# Altium PCB FM375_LQFP64_SOCKET.PcbDoc (part 3 of 3)
Units mil, origin at the board's own origin, x right, y up, seen from the top; angles counter-clockwise.
Board outline 6000 x 4000 mil, 2 copper layers (Top Layer, Bottom Layer); 12 components, 66 nets, 201 pads, 0 vias.
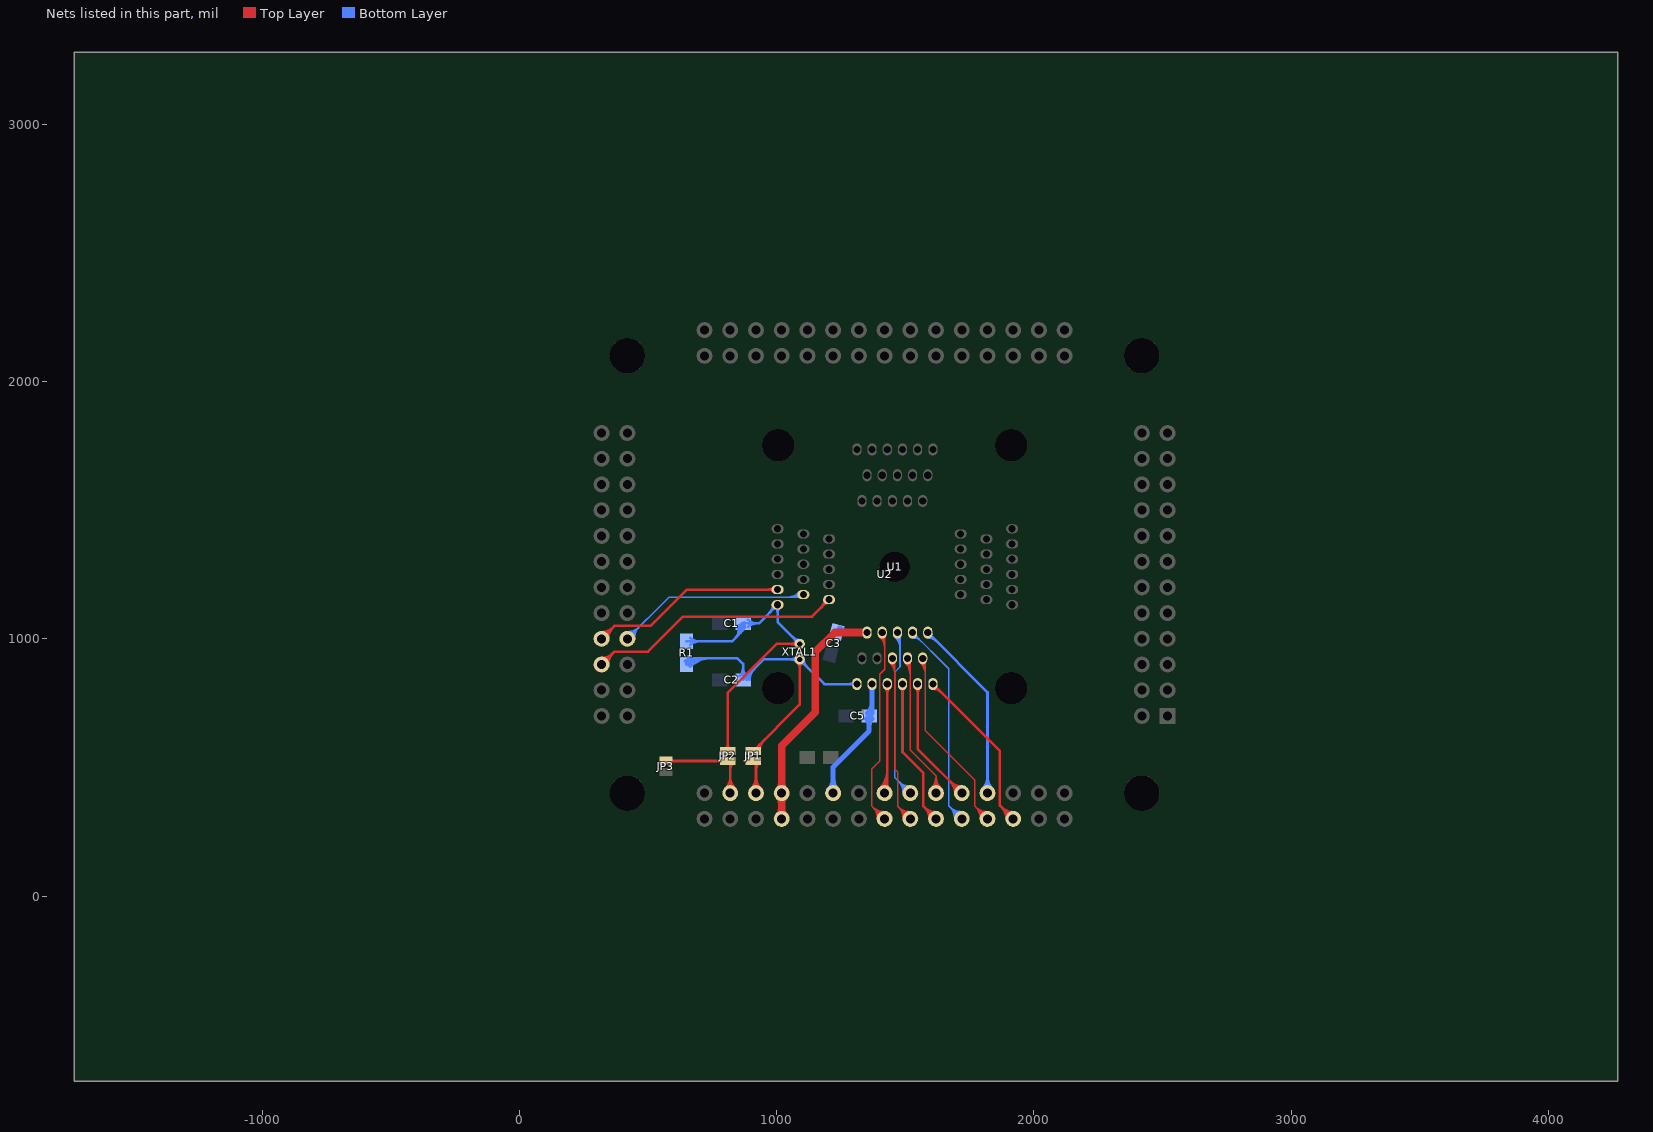
[diagram p3: the nets of this part, all layers, seen from the top]

## Nets (pads, with @x,y where several pads share a name; then routed paths per layer and width w, separated by ;. In a path a pad name is that pad's centre, name@x,y a point inside that pad or via, vN(x,y) a via of type N, cw(c..) or ccw(c..) an arc to the next point about the centre after c; other vN are vias at no path point) (continued)
PF4: U1.45 U2.71 | length 1593.4
  Top Layer w10: U2.71@320,1000 370,1050 510,1050 651.42,1191.42 U1.45@1004.09,1191.42 ; U2.71@320,1016 ccw(c320,1054.63) 347.31,1027.31 ; U2.71@320,1016 ccw(c320,1054.63) 347.31,1027.31 ; U2.71@320,1016 ccw(c320,1054.63) 347.31,1027.31 ; U2.71@320,1016 ccw(c320,1054.63) 347.31,1027.31 ; U2.71@320,1026 ccw(c320,1088.77) 364.38,1044.38 ; U2.71@320,1026 ccw(c320,1088.77) 364.38,1044.38 ; U2.71@320,1026 ccw(c320,1088.77) 364.38,1044.38 ; U2.71@320,1026 ccw(c320,1088.77) 364.38,1044.38 ; U2.71@336,1000 cw(c374.63,1000) 347.31,1027.31 ; U2.71@336,1000 cw(c374.63,1000) 347.31,1027.31 ; U2.71@336,1000 cw(c374.63,1000) 347.31,1027.31 ; U2.71@336,1000 cw(c374.63,1000) 347.31,1027.31 ; U2.71@346,1000 cw(c408.77,1000) 364.38,1044.38 ; U2.71@346,1000 cw(c408.77,1000) 364.38,1044.38 ; U2.71@346,1000 cw(c408.77,1000) 364.38,1044.38 ; U2.71@346,1000 cw(c408.77,1000) 364.38,1044.38 ; 967.49,1191.42 cw(c967.49,1160.72) U1.45@989.2,1182.43 ; 967.49,1191.42 ccw(c967.49,1222.12) U1.45@989.2,1200.41 ; 967.49,1191.42 cw(c967.49,1160.72) U1.45@989.2,1182.43 ; 967.49,1191.42 ccw(c967.49,1222.12) U1.45@989.2,1200.41 ; 967.49,1191.42 ccw(c967.49,1222.12) U1.45@989.2,1200.41 ; 967.49,1191.42 cw(c967.49,1160.72) U1.45@989.2,1182.43 ; 967.49,1191.42 ccw(c967.49,1222.12) U1.45@989.2,1200.41 ; 967.49,1191.42 cw(c967.49,1160.72) U1.45@989.2,1182.43
PF5: U1.46 U2.72 | length 2390.3
  Bottom Layer w6: U2.72@420,1000 581,1161 1093.36,1161 U1.46@1104.09,1171.73 ; U2.72@420,1016 ccw(c420,1054.63) 447.31,1027.31 ; U2.72@420,1016 ccw(c420,1054.63) 447.31,1027.31 ; U2.72@420,1016 ccw(c420,1054.63) 447.31,1027.31 ; U2.72@420,1016 ccw(c420,1054.63) 447.31,1027.31 ; U2.72@420,1022 ccw(c420,1075.11) 457.56,1037.56 ; U2.72@420,1022 ccw(c420,1075.11) 457.56,1037.56 ; U2.72@420,1022 ccw(c420,1075.11) 457.56,1037.56 ; U2.72@420,1022 ccw(c420,1075.11) 457.56,1037.56 ; U2.72@420,1028 ccw(c420,1095.6) 467.8,1047.8 ; U2.72@420,1028 ccw(c420,1095.6) 467.8,1047.8 ; U2.72@420,1028 ccw(c420,1095.6) 467.8,1047.8 ; U2.72@420,1028 ccw(c420,1095.6) 467.8,1047.8 ; U2.72@436,1000 cw(c474.63,1000) 447.31,1027.31 ; U2.72@436,1000 cw(c474.63,1000) 447.31,1027.31 ; U2.72@436,1000 cw(c474.63,1000) 447.31,1027.31 ; U2.72@436,1000 cw(c474.63,1000) 447.31,1027.31 ; U2.72@442,1000 cw(c495.11,1000) 457.56,1037.56 ; U2.72@442,1000 cw(c495.11,1000) 457.56,1037.56 ; U2.72@442,1000 cw(c495.11,1000) 457.56,1037.56 ; U2.72@442,1000 cw(c495.11,1000) 457.56,1037.56 ; U2.72@448,1000 cw(c515.6,1000) 467.8,1047.8 ; U2.72@448,1000 cw(c515.6,1000) 467.8,1047.8 ; U2.72@448,1000 cw(c515.6,1000) 467.8,1047.8 ; U2.72@448,1000 cw(c515.6,1000) 467.8,1047.8 ; 1036.75,1161 ccw(c1036.75,1233.17) U1.46@1087.78,1182.14 ; 1036.75,1161 ccw(c1036.75,1233.17) U1.46@1087.78,1182.14 ; 1036.75,1161 ccw(c1036.75,1233.17) U1.46@1087.78,1182.14 ; 1036.75,1161 ccw(c1036.75,1233.17) U1.46@1087.78,1182.14 ; 1051.24,1161 ccw(c1051.24,1218.69) U1.46@1092.03,1177.9 ; 1051.24,1161 ccw(c1051.24,1218.69) U1.46@1092.03,1177.9 ; 1051.24,1161 ccw(c1051.24,1218.69) U1.46@1092.03,1177.9 ; 1051.24,1161 ccw(c1051.24,1218.69) U1.46@1092.03,1177.9 ; 1065.72,1161 ccw(c1065.72,1204.2) U1.46@1096.27,1173.65 ; 1065.72,1161 ccw(c1065.72,1204.2) U1.46@1096.27,1173.65 ; 1065.72,1161 ccw(c1065.72,1204.2) U1.46@1096.27,1173.65 ; 1065.72,1161 ccw(c1065.72,1204.2) U1.46@1096.27,1173.65 ; 1080.21,1161 ccw(c1080.21,1189.72) U1.46@1100.51,1169.41 ; 1080.21,1161 ccw(c1080.21,1189.72) U1.46@1100.51,1169.41 ; 1080.21,1161 ccw(c1080.21,1189.72) U1.46@1100.51,1169.41 ; 1080.21,1161 ccw(c1080.21,1189.72) U1.46@1100.51,1169.41
PF6: U1.47 U2.73 | length 1818.5
  Top Layer w10: U2.73@320,900 370,950 501,950 637,1086 1138.05,1086 U1.47@1204.09,1152.05 ; U2.73@320,916 ccw(c320,954.63) 347.31,927.31 ; U2.73@320,916 ccw(c320,954.63) 347.31,927.31 ; U2.73@320,916 ccw(c320,954.63) 347.31,927.31 ; U2.73@320,916 ccw(c320,954.63) 347.31,927.31 ; U2.73@320,926 ccw(c320,988.77) 364.38,944.38 ; U2.73@320,926 ccw(c320,988.77) 364.38,944.38 ; U2.73@320,926 ccw(c320,988.77) 364.38,944.38 ; U2.73@320,926 ccw(c320,988.77) 364.38,944.38 ; U2.73@336,900 cw(c374.63,900) 347.31,927.31 ; U2.73@336,900 cw(c374.63,900) 347.31,927.31 ; U2.73@336,900 cw(c374.63,900) 347.31,927.31 ; U2.73@336,900 cw(c374.63,900) 347.31,927.31 ; U2.73@346,900 cw(c408.77,900) 364.38,944.38 ; U2.73@346,900 cw(c408.77,900) 364.38,944.38 ; U2.73@346,900 cw(c408.77,900) 364.38,944.38 ; U2.73@346,900 cw(c408.77,900) 364.38,944.38 ; 1172.3,1120.26 ccw(c1140.51,1152.05) U1.47@1185.47,1152.05 ; 1172.3,1120.26 ccw(c1140.51,1152.05) U1.47@1185.47,1152.05 ; 1172.3,1120.26 ccw(c1140.51,1152.05) U1.47@1185.47,1152.05 ; 1172.3,1120.26 ccw(c1140.51,1152.05) U1.47@1185.47,1152.05 ; 1186.56,1134.51 cw(c1198.19,1122.89) U1.47@1198.19,1139.33 ; 1186.56,1134.51 cw(c1198.19,1122.89) U1.47@1198.19,1139.33 ; 1186.56,1134.51 cw(c1198.19,1122.89) U1.47@1198.19,1139.33 ; 1186.56,1134.51 cw(c1198.19,1122.89) U1.47@1198.19,1139.33
PF7: U1.64 U2.103 | length 1483.5
  Top Layer w10: U1.64@1607.64,824.09 1868,563.73 1868,352 U2.103@1920,300 ; U1.64@1607.64,805.47 cw(c1607.64,760.51) 1639.43,792.3 ; U1.64@1607.64,805.47 cw(c1607.64,760.51) 1639.43,792.3 ; U1.64@1607.64,805.47 cw(c1607.64,760.51) 1639.43,792.3 ; U1.64@1607.64,805.47 cw(c1607.64,760.51) 1639.43,792.3 ; U1.64@1620.35,818.19 ccw(c1636.8,818.19) 1625.17,806.56 ; U1.64@1620.35,818.19 ccw(c1636.8,818.19) 1625.17,806.56 ; U1.64@1620.35,818.19 ccw(c1636.8,818.19) 1625.17,806.56 ; U1.64@1620.35,818.19 ccw(c1636.8,818.19) 1625.17,806.56 ; 1875.62,344.38 cw(c1831.23,300) U2.103@1894,300 ; 1875.62,344.38 ccw(c1920,388.77) U2.103@1920,326 ; 1875.62,344.38 cw(c1831.23,300) U2.103@1894,300 ; 1875.62,344.38 ccw(c1920,388.77) U2.103@1920,326 ; 1875.62,344.38 ccw(c1920,388.77) U2.103@1920,326 ; 1875.62,344.38 cw(c1831.23,300) U2.103@1894,300 ; 1875.62,344.38 ccw(c1920,388.77) U2.103@1920,326 ; 1875.62,344.38 cw(c1831.23,300) U2.103@1894,300 ; 1892.69,327.31 cw(c1865.37,300) U2.103@1904,300 ; 1892.69,327.31 ccw(c1920,354.63) U2.103@1920,316 ; 1892.69,327.31 cw(c1865.37,300) U2.103@1904,300 ; 1892.69,327.31 ccw(c1920,354.63) U2.103@1920,316 ; 1892.69,327.31 ccw(c1920,354.63) U2.103@1920,316 ; 1892.69,327.31 cw(c1865.37,300) U2.103@1904,300 ; 1892.69,327.31 ccw(c1920,354.63) U2.103@1920,316 ; 1892.69,327.31 cw(c1865.37,300) U2.103@1904,300
PG0: U1.56 U2.95 | length 2249.9
  Top Layer w6: U1.56@1450.16,924.09 1460,914.25 1460,493 1471,482 1471,349 U2.95@1520,300 ; U1.56@1439.75,907.78 cw(c1390.87,858.9) 1460,858.9 ; U1.56@1439.75,907.78 cw(c1390.87,858.9) 1460,858.9 ; U1.56@1439.75,907.78 cw(c1390.87,858.9) 1460,858.9 ; U1.56@1439.75,907.78 cw(c1390.87,858.9) 1460,858.9 ; U1.56@1443.99,912.03 cw(c1405.35,873.38) 1460,873.38 ; U1.56@1443.99,912.03 cw(c1405.35,873.38) 1460,873.38 ; U1.56@1443.99,912.03 cw(c1405.35,873.38) 1460,873.38 ; U1.56@1443.99,912.03 cw(c1405.35,873.38) 1460,873.38 ; U1.56@1448.24,916.27 cw(c1419.84,887.87) 1460,887.87 ; U1.56@1448.24,916.27 cw(c1419.84,887.87) 1460,887.87 ; U1.56@1448.24,916.27 cw(c1419.84,887.87) 1460,887.87 ; U1.56@1448.24,916.27 cw(c1419.84,887.87) 1460,887.87 ; U1.56@1452.48,920.51 cw(c1434.32,902.35) 1460,902.35 ; U1.56@1452.48,920.51 cw(c1434.32,902.35) 1460,902.35 ; U1.56@1452.48,920.51 cw(c1434.32,902.35) 1460,902.35 ; U1.56@1452.48,920.51 cw(c1434.32,902.35) 1460,902.35 ; 1472.2,347.8 cw(c1424.4,300) U2.95@1492,300 ; 1472.2,347.8 ccw(c1520,395.6) U2.95@1520,328 ; 1472.2,347.8 cw(c1424.4,300) U2.95@1492,300 ; 1472.2,347.8 ccw(c1520,395.6) U2.95@1520,328 ; 1472.2,347.8 ccw(c1520,395.6) U2.95@1520,328 ; 1472.2,347.8 cw(c1424.4,300) U2.95@1492,300 ; 1472.2,347.8 ccw(c1520,395.6) U2.95@1520,328 ; 1472.2,347.8 cw(c1424.4,300) U2.95@1492,300 ; 1482.44,337.56 cw(c1444.89,300) U2.95@1498,300 ; 1482.44,337.56 ccw(c1520,375.11) U2.95@1520,322 ; 1482.44,337.56 cw(c1444.89,300) U2.95@1498,300 ; 1482.44,337.56 ccw(c1520,375.11) U2.95@1520,322 ; 1482.44,337.56 ccw(c1520,375.11) U2.95@1520,322 ; 1482.44,337.56 cw(c1444.89,300) U2.95@1498,300 ; 1482.44,337.56 ccw(c1520,375.11) U2.95@1520,322 ; 1482.44,337.56 cw(c1444.89,300) U2.95@1498,300 ; 1492.69,327.31 cw(c1465.37,300) U2.95@1504,300 ; 1492.69,327.31 ccw(c1520,354.63) U2.95@1520,316 ; 1492.69,327.31 cw(c1465.37,300) U2.95@1504,300 ; 1492.69,327.31 ccw(c1520,354.63) U2.95@1520,316 ; 1492.69,327.31 ccw(c1520,354.63) U2.95@1520,316 ; 1492.69,327.31 cw(c1465.37,300) U2.95@1504,300 ; 1492.69,327.31 ccw(c1520,354.63) U2.95@1520,316 ; 1492.69,327.31 cw(c1465.37,300) U2.95@1504,300
PG1: U1.57 U2.96 | length 2271.8
  Bottom Layer w6: U1.57@1469.84,1024.09 1480,1013.94 1480,891 1460,871 1460,460 U2.96@1520,400 ; U1.57@1459.44,1007.78 cw(c1409.79,958.14) 1480,958.14 ; U1.57@1459.44,1007.78 cw(c1409.79,958.14) 1480,958.14 ; U1.57@1459.44,1007.78 cw(c1409.79,958.14) 1480,958.14 ; U1.57@1459.44,1007.78 cw(c1409.79,958.14) 1480,958.14 ; U1.57@1463.68,1012.03 cw(c1424.28,972.62) 1480,972.62 ; U1.57@1463.68,1012.03 cw(c1424.28,972.62) 1480,972.62 ; U1.57@1463.68,1012.03 cw(c1424.28,972.62) 1480,972.62 ; U1.57@1463.68,1012.03 cw(c1424.28,972.62) 1480,972.62 ; U1.57@1467.92,1016.27 cw(c1438.76,987.11) 1480,987.11 ; U1.57@1467.92,1016.27 cw(c1438.76,987.11) 1480,987.11 ; U1.57@1467.92,1016.27 cw(c1438.76,987.11) 1480,987.11 ; U1.57@1467.92,1016.27 cw(c1438.76,987.11) 1480,987.11 ; U1.57@1472.16,1020.51 cw(c1453.25,1001.59) 1480,1001.59 ; U1.57@1472.16,1020.51 cw(c1453.25,1001.59) 1480,1001.59 ; U1.57@1472.16,1020.51 cw(c1453.25,1001.59) 1480,1001.59 ; U1.57@1472.16,1020.51 cw(c1453.25,1001.59) 1480,1001.59 ; 1472.2,447.8 cw(c1424.4,400) U2.96@1492,400 ; 1472.2,447.8 ccw(c1520,495.6) U2.96@1520,428 ; 1472.2,447.8 cw(c1424.4,400) U2.96@1492,400 ; 1472.2,447.8 ccw(c1520,495.6) U2.96@1520,428 ; 1472.2,447.8 ccw(c1520,495.6) U2.96@1520,428 ; 1472.2,447.8 cw(c1424.4,400) U2.96@1492,400 ; 1472.2,447.8 ccw(c1520,495.6) U2.96@1520,428 ; 1472.2,447.8 cw(c1424.4,400) U2.96@1492,400 ; 1482.44,437.56 cw(c1444.89,400) U2.96@1498,400 ; 1482.44,437.56 ccw(c1520,475.11) U2.96@1520,422 ; 1482.44,437.56 cw(c1444.89,400) U2.96@1498,400 ; 1482.44,437.56 ccw(c1520,475.11) U2.96@1520,422 ; 1482.44,437.56 ccw(c1520,475.11) U2.96@1520,422 ; 1482.44,437.56 cw(c1444.89,400) U2.96@1498,400 ; 1482.44,437.56 ccw(c1520,475.11) U2.96@1520,422 ; 1482.44,437.56 cw(c1444.89,400) U2.96@1498,400 ; 1492.69,427.31 cw(c1465.37,400) U2.96@1504,400 ; 1492.69,427.31 ccw(c1520,454.63) U2.96@1520,416 ; 1492.69,427.31 cw(c1465.37,400) U2.96@1504,400 ; 1492.69,427.31 ccw(c1520,454.63) U2.96@1520,416 ; 1492.69,427.31 ccw(c1520,454.63) U2.96@1520,416 ; 1492.69,427.31 cw(c1465.37,400) U2.96@1504,400 ; 1492.69,427.31 ccw(c1520,454.63) U2.96@1520,416 ; 1492.69,427.31 cw(c1465.37,400) U2.96@1504,400
PG2: U1.58 U2.97 | length 1408.1
  Top Layer w10: U1.58@1489.53,824.09 1489.53,559.47 1571,478 1571,349 U2.97@1620,300 ; U1.58@1480.54,809.2 cw(c1458.83,787.49) 1489.53,787.49 ; U1.58@1480.54,809.2 cw(c1458.83,787.49) 1489.53,787.49 ; U1.58@1480.54,809.2 cw(c1458.83,787.49) 1489.53,787.49 ; U1.58@1480.54,809.2 cw(c1458.83,787.49) 1489.53,787.49 ; 1489.53,787.49 cw(c1520.23,787.49) U1.58@1498.52,809.2 ; 1489.53,787.49 cw(c1520.23,787.49) U1.58@1498.52,809.2 ; 1489.53,787.49 cw(c1520.23,787.49) U1.58@1498.52,809.2 ; 1489.53,787.49 cw(c1520.23,787.49) U1.58@1498.52,809.2 ; 1575.62,344.38 cw(c1531.23,300) U2.97@1594,300 ; 1575.62,344.38 ccw(c1620,388.77) U2.97@1620,326 ; 1575.62,344.38 cw(c1531.23,300) U2.97@1594,300 ; 1575.62,344.38 ccw(c1620,388.77) U2.97@1620,326 ; 1575.62,344.38 ccw(c1620,388.77) U2.97@1620,326 ; 1575.62,344.38 cw(c1531.23,300) U2.97@1594,300 ; 1575.62,344.38 ccw(c1620,388.77) U2.97@1620,326 ; 1575.62,344.38 cw(c1531.23,300) U2.97@1594,300 ; 1592.69,327.31 cw(c1565.37,300) U2.97@1604,300 ; 1592.69,327.31 ccw(c1620,354.63) U2.97@1620,316 ; 1592.69,327.31 cw(c1565.37,300) U2.97@1604,300 ; 1592.69,327.31 ccw(c1620,354.63) U2.97@1620,316 ; 1592.69,327.31 ccw(c1620,354.63) U2.97@1620,316 ; 1592.69,327.31 cw(c1565.37,300) U2.97@1604,300 ; 1592.69,327.31 ccw(c1620,354.63) U2.97@1620,316 ; 1592.69,327.31 cw(c1565.37,300) U2.97@1604,300
PG3: U1.59 U2.98 | length 2164.5
  Top Layer w6: U1.59@1509.21,924.09 1519,914.31 1519,569 1620,468 U2.98@1620,400 ; U1.59@1498.81,907.78 cw(c1450.06,859.03) 1519,859.03 ; U1.59@1498.81,907.78 cw(c1450.06,859.03) 1519,859.03 ; U1.59@1498.81,907.78 cw(c1450.06,859.03) 1519,859.03 ; U1.59@1498.81,907.78 cw(c1450.06,859.03) 1519,859.03 ; U1.59@1503.05,912.03 cw(c1464.54,873.52) 1519,873.52 ; U1.59@1503.05,912.03 cw(c1464.54,873.52) 1519,873.52 ; U1.59@1503.05,912.03 cw(c1464.54,873.52) 1519,873.52 ; U1.59@1503.05,912.03 cw(c1464.54,873.52) 1519,873.52 ; U1.59@1507.29,916.27 cw(c1479.03,888) 1519,888 ; U1.59@1507.29,916.27 cw(c1479.03,888) 1519,888 ; U1.59@1507.29,916.27 cw(c1479.03,888) 1519,888 ; U1.59@1507.29,916.27 cw(c1479.03,888) 1519,888 ; U1.59@1511.53,920.51 cw(c1493.51,902.49) 1519,902.49 ; U1.59@1511.53,920.51 cw(c1493.51,902.49) 1519,902.49 ; U1.59@1511.53,920.51 cw(c1493.51,902.49) 1519,902.49 ; U1.59@1511.53,920.51 cw(c1493.51,902.49) 1519,902.49 ; U2.98@1600.2,419.8 ccw(c1552.4,467.6) 1620,467.6 ; U2.98@1600.2,419.8 ccw(c1552.4,467.6) 1620,467.6 ; U2.98@1600.2,419.8 ccw(c1552.4,467.6) 1620,467.6 ; U2.98@1600.2,419.8 ccw(c1552.4,467.6) 1620,467.6 ; U2.98@1604.44,415.56 ccw(c1566.89,453.11) 1620,453.11 ; U2.98@1604.44,415.56 ccw(c1566.89,453.11) 1620,453.11 ; U2.98@1604.44,415.56 ccw(c1566.89,453.11) 1620,453.11 ; U2.98@1604.44,415.56 ccw(c1566.89,453.11) 1620,453.11 ; U2.98@1608.69,411.31 ccw(c1581.37,438.63) 1620,438.63 ; U2.98@1608.69,411.31 ccw(c1581.37,438.63) 1620,438.63 ; U2.98@1608.69,411.31 ccw(c1581.37,438.63) 1620,438.63 ; U2.98@1608.69,411.31 ccw(c1581.37,438.63) 1620,438.63 ; 1620,438.63 ccw(c1658.63,438.63) U2.98@1631.31,411.31 ; 1620,438.63 ccw(c1658.63,438.63) U2.98@1631.31,411.31 ; 1620,438.63 ccw(c1658.63,438.63) U2.98@1631.31,411.31 ; 1620,438.63 ccw(c1658.63,438.63) U2.98@1631.31,411.31 ; 1620,453.11 ccw(c1673.11,453.11) U2.98@1635.56,415.56 ; 1620,453.11 ccw(c1673.11,453.11) U2.98@1635.56,415.56 ; 1620,453.11 ccw(c1673.11,453.11) U2.98@1635.56,415.56 ; 1620,453.11 ccw(c1673.11,453.11) U2.98@1635.56,415.56 ; 1620,467.6 ccw(c1687.6,467.6) U2.98@1639.8,419.8 ; 1620,467.6 ccw(c1687.6,467.6) U2.98@1639.8,419.8 ; 1620,467.6 ccw(c1687.6,467.6) U2.98@1639.8,419.8 ; 1620,467.6 ccw(c1687.6,467.6) U2.98@1639.8,419.8
PG4: U1.60 U2.99 | length 2138.5
  Bottom Layer w6: U1.60@1528.9,1024.09 1669,883.99 1669,351 U2.99@1720,300 ; U1.60@1528.9,1003.47 cw(c1528.9,953.69) 1564.1,988.89 ; U1.60@1528.9,1003.47 cw(c1528.9,953.69) 1564.1,988.89 ; U1.60@1528.9,1003.47 cw(c1528.9,953.69) 1564.1,988.89 ; U1.60@1528.9,1003.47 cw(c1528.9,953.69) 1564.1,988.89 ; U1.60@1528.9,1009.47 cw(c1528.9,974.17) 1553.86,999.13 ; U1.60@1528.9,1009.47 cw(c1528.9,974.17) 1553.86,999.13 ; U1.60@1528.9,1009.47 cw(c1528.9,974.17) 1553.86,999.13 ; U1.60@1528.9,1009.47 cw(c1528.9,974.17) 1553.86,999.13 ; U1.60@1543.61,1018.19 ccw(c1564.89,1018.19) 1549.84,1003.15 ; U1.60@1543.61,1018.19 ccw(c1564.89,1018.19) 1549.84,1003.15 ; U1.60@1543.61,1018.19 ccw(c1564.89,1018.19) 1549.84,1003.15 ; U1.60@1543.61,1018.19 ccw(c1564.89,1018.19) 1549.84,1003.15 ; 1672.2,347.8 cw(c1624.4,300) U2.99@1692,300 ; 1672.2,347.8 ccw(c1720,395.6) U2.99@1720,328 ; 1672.2,347.8 cw(c1624.4,300) U2.99@1692,300 ; 1672.2,347.8 ccw(c1720,395.6) U2.99@1720,328 ; 1672.2,347.8 ccw(c1720,395.6) U2.99@1720,328 ; 1672.2,347.8 cw(c1624.4,300) U2.99@1692,300 ; 1672.2,347.8 ccw(c1720,395.6) U2.99@1720,328 ; 1672.2,347.8 cw(c1624.4,300) U2.99@1692,300 ; 1682.44,337.56 cw(c1644.89,300) U2.99@1698,300 ; 1682.44,337.56 ccw(c1720,375.11) U2.99@1720,322 ; 1682.44,337.56 cw(c1644.89,300) U2.99@1698,300 ; 1682.44,337.56 ccw(c1720,375.11) U2.99@1720,322 ; 1682.44,337.56 ccw(c1720,375.11) U2.99@1720,322 ; 1682.44,337.56 cw(c1644.89,300) U2.99@1698,300 ; 1682.44,337.56 ccw(c1720,375.11) U2.99@1720,322 ; 1682.44,337.56 cw(c1644.89,300) U2.99@1698,300 ; 1692.69,327.31 cw(c1665.37,300) U2.99@1704,300 ; 1692.69,327.31 ccw(c1720,354.63) U2.99@1720,316 ; 1692.69,327.31 cw(c1665.37,300) U2.99@1704,300 ; 1692.69,327.31 ccw(c1720,354.63) U2.99@1720,316 ; 1692.69,327.31 ccw(c1720,354.63) U2.99@1720,316 ; 1692.69,327.31 cw(c1665.37,300) U2.99@1704,300 ; 1692.69,327.31 ccw(c1720,354.63) U2.99@1720,316 ; 1692.69,327.31 cw(c1665.37,300) U2.99@1704,300
PG5: U1.61 U2.100 | length 1325.1
  Top Layer w10: U1.61@1548.58,824.09 1548.58,571.42 U2.100@1720,400 ; U1.61@1539.59,809.2 cw(c1517.88,787.49) 1548.58,787.49 ; U1.61@1539.59,809.2 cw(c1517.88,787.49) 1548.58,787.49 ; U1.61@1539.59,809.2 cw(c1517.88,787.49) 1548.58,787.49 ; U1.61@1539.59,809.2 cw(c1517.88,787.49) 1548.58,787.49 ; 1548.58,787.49 cw(c1579.28,787.49) U1.61@1557.57,809.2 ; 1548.58,787.49 cw(c1579.28,787.49) U1.61@1557.57,809.2 ; 1548.58,787.49 cw(c1579.28,787.49) U1.61@1557.57,809.2 ; 1548.58,787.49 cw(c1579.28,787.49) U1.61@1557.57,809.2 ; 1675.62,444.38 cw(c1631.23,400) U2.100@1694,400 ; 1675.62,444.38 ccw(c1720,488.77) U2.100@1720,426 ; 1675.62,444.38 cw(c1631.23,400) U2.100@1694,400 ; 1675.62,444.38 ccw(c1720,488.77) U2.100@1720,426 ; 1675.62,444.38 ccw(c1720,488.77) U2.100@1720,426 ; 1675.62,444.38 cw(c1631.23,400) U2.100@1694,400 ; 1675.62,444.38 ccw(c1720,488.77) U2.100@1720,426 ; 1675.62,444.38 cw(c1631.23,400) U2.100@1694,400 ; 1692.69,427.31 cw(c1665.37,400) U2.100@1704,400 ; 1692.69,427.31 ccw(c1720,454.63) U2.100@1720,416 ; 1692.69,427.31 cw(c1665.37,400) U2.100@1704,400 ; 1692.69,427.31 ccw(c1720,454.63) U2.100@1720,416 ; 1692.69,427.31 ccw(c1720,454.63) U2.100@1720,416 ; 1692.69,427.31 cw(c1665.37,400) U2.100@1704,400 ; 1692.69,427.31 ccw(c1720,454.63) U2.100@1720,416 ; 1692.69,427.31 cw(c1665.37,400) U2.100@1704,400
PG6: U1.62 U2.101 | length 2320.5
  Top Layer w6: U1.62@1568.27,924.09 1578,914.36 1578,643 1771,450 1771,349 U2.101@1820,300 ; U1.62@1557.86,907.78 cw(c1509.24,859.16) 1578,859.16 ; U1.62@1557.86,907.78 cw(c1509.24,859.16) 1578,859.16 ; U1.62@1557.86,907.78 cw(c1509.24,859.16) 1578,859.16 ; U1.62@1557.86,907.78 cw(c1509.24,859.16) 1578,859.16 ; U1.62@1562.1,912.03 cw(c1523.73,873.65) 1578,873.65 ; U1.62@1562.1,912.03 cw(c1523.73,873.65) 1578,873.65 ; U1.62@1562.1,912.03 cw(c1523.73,873.65) 1578,873.65 ; U1.62@1562.1,912.03 cw(c1523.73,873.65) 1578,873.65 ; U1.62@1566.35,916.27 cw(c1538.21,888.13) 1578,888.13 ; U1.62@1566.35,916.27 cw(c1538.21,888.13) 1578,888.13 ; U1.62@1566.35,916.27 cw(c1538.21,888.13) 1578,888.13 ; U1.62@1566.35,916.27 cw(c1538.21,888.13) 1578,888.13 ; U1.62@1570.59,920.51 cw(c1552.7,902.62) 1578,902.62 ; U1.62@1570.59,920.51 cw(c1552.7,902.62) 1578,902.62 ; U1.62@1570.59,920.51 cw(c1552.7,902.62) 1578,902.62 ; U1.62@1570.59,920.51 cw(c1552.7,902.62) 1578,902.62 ; 1772.2,347.8 cw(c1724.4,300) U2.101@1792,300 ; 1772.2,347.8 ccw(c1820,395.6) U2.101@1820,328 ; 1772.2,347.8 cw(c1724.4,300) U2.101@1792,300 ; 1772.2,347.8 ccw(c1820,395.6) U2.101@1820,328 ; 1772.2,347.8 ccw(c1820,395.6) U2.101@1820,328 ; 1772.2,347.8 cw(c1724.4,300) U2.101@1792,300 ; 1772.2,347.8 ccw(c1820,395.6) U2.101@1820,328 ; 1772.2,347.8 cw(c1724.4,300) U2.101@1792,300 ; 1782.44,337.56 cw(c1744.89,300) U2.101@1798,300 ; 1782.44,337.56 ccw(c1820,375.11) U2.101@1820,322 ; 1782.44,337.56 cw(c1744.89,300) U2.101@1798,300 ; 1782.44,337.56 ccw(c1820,375.11) U2.101@1820,322 ; 1782.44,337.56 ccw(c1820,375.11) U2.101@1820,322 ; 1782.44,337.56 cw(c1744.89,300) U2.101@1798,300 ; 1782.44,337.56 ccw(c1820,375.11) U2.101@1820,322 ; 1782.44,337.56 cw(c1744.89,300) U2.101@1798,300 ; 1792.69,327.31 cw(c1765.37,300) U2.101@1804,300 ; 1792.69,327.31 ccw(c1820,354.63) U2.101@1820,316 ; 1792.69,327.31 cw(c1765.37,300) U2.101@1804,300 ; 1792.69,327.31 ccw(c1820,354.63) U2.101@1820,316 ; 1792.69,327.31 ccw(c1820,354.63) U2.101@1820,316 ; 1792.69,327.31 cw(c1765.37,300) U2.101@1804,300 ; 1792.69,327.31 ccw(c1820,354.63) U2.101@1820,316 ; 1792.69,327.31 cw(c1765.37,300) U2.101@1804,300
PG7: U1.63 U2.102 | length 1550.2
  Bottom Layer w10: U1.63@1587.95,1024.09 1820,792.05 U2.102@1820,400 ; U1.63@1587.95,1005.47 cw(c1587.95,960.51) 1619.74,992.3 ; U1.63@1587.95,1005.47 cw(c1587.95,960.51) 1619.74,992.3 ; U1.63@1587.95,1005.47 cw(c1587.95,960.51) 1619.74,992.3 ; U1.63@1587.95,1005.47 cw(c1587.95,960.51) 1619.74,992.3 ; U1.63@1600.67,1018.19 ccw(c1617.11,1018.19) 1605.49,1006.56 ; U1.63@1600.67,1018.19 ccw(c1617.11,1018.19) 1605.49,1006.56 ; U1.63@1600.67,1018.19 ccw(c1617.11,1018.19) 1605.49,1006.56 ; U1.63@1600.67,1018.19 ccw(c1617.11,1018.19) 1605.49,1006.56 ; U2.102@1801.62,418.38 ccw(c1757.23,462.77) 1820,462.77 ; U2.102@1801.62,418.38 ccw(c1757.23,462.77) 1820,462.77 ; U2.102@1801.62,418.38 ccw(c1757.23,462.77) 1820,462.77 ; U2.102@1801.62,418.38 ccw(c1757.23,462.77) 1820,462.77 ; U2.102@1808.69,411.31 ccw(c1781.37,438.63) 1820,438.63 ; U2.102@1808.69,411.31 ccw(c1781.37,438.63) 1820,438.63 ; U2.102@1808.69,411.31 ccw(c1781.37,438.63) 1820,438.63 ; U2.102@1808.69,411.31 ccw(c1781.37,438.63) 1820,438.63 ; 1820,438.63 ccw(c1858.63,438.63) U2.102@1831.31,411.31 ; 1820,438.63 ccw(c1858.63,438.63) U2.102@1831.31,411.31 ; 1820,438.63 ccw(c1858.63,438.63) U2.102@1831.31,411.31 ; 1820,438.63 ccw(c1858.63,438.63) U2.102@1831.31,411.31 ; 1820,462.77 ccw(c1882.77,462.77) U2.102@1838.38,418.38 ; 1820,462.77 ccw(c1882.77,462.77) U2.102@1838.38,418.38 ; 1820,462.77 ccw(c1882.77,462.77) U2.102@1838.38,418.38 ; 1820,462.77 ccw(c1882.77,462.77) U2.102@1838.38,418.38
PH0: U1.54 U2.93 | length 2382.9
  Top Layer w6: U1.54@1410.79,1024.09 1421,1013.88 1421,882 1401,862 1401,525 1370,494 1370,350 U2.93@1420,300 ; 1372.2,347.8 cw(c1324.4,300) U2.93@1392,300 ; 1372.2,347.8 ccw(c1420,395.6) U2.93@1420,328 ; 1372.2,347.8 cw(c1324.4,300) U2.93@1392,300 ; 1372.2,347.8 ccw(c1420,395.6) U2.93@1420,328 ; 1372.2,347.8 ccw(c1420,395.6) U2.93@1420,328 ; 1372.2,347.8 cw(c1324.4,300) U2.93@1392,300 ; 1372.2,347.8 ccw(c1420,395.6) U2.93@1420,328 ; 1372.2,347.8 cw(c1324.4,300) U2.93@1392,300 ; 1382.44,337.56 cw(c1344.89,300) U2.93@1398,300 ; 1382.44,337.56 ccw(c1420,375.11) U2.93@1420,322 ; 1382.44,337.56 cw(c1344.89,300) U2.93@1398,300 ; 1382.44,337.56 ccw(c1420,375.11) U2.93@1420,322 ; 1382.44,337.56 ccw(c1420,375.11) U2.93@1420,322 ; 1382.44,337.56 cw(c1344.89,300) U2.93@1398,300 ; 1382.44,337.56 ccw(c1420,375.11) U2.93@1420,322 ; 1382.44,337.56 cw(c1344.89,300) U2.93@1398,300 ; 1392.69,327.31 cw(c1365.37,300) U2.93@1404,300 ; 1392.69,327.31 ccw(c1420,354.63) U2.93@1420,316 ; 1392.69,327.31 cw(c1365.37,300) U2.93@1404,300 ; 1392.69,327.31 ccw(c1420,354.63) U2.93@1420,316 ; 1392.69,327.31 ccw(c1420,354.63) U2.93@1420,316 ; 1392.69,327.31 cw(c1365.37,300) U2.93@1404,300 ; 1392.69,327.31 ccw(c1420,354.63) U2.93@1420,316 ; 1392.69,327.31 cw(c1365.37,300) U2.93@1404,300 ; U1.54@1400.38,1007.78 cw(c1350.6,958) 1421,958 ; U1.54@1400.38,1007.78 cw(c1350.6,958) 1421,958 ; U1.54@1400.38,1007.78 cw(c1350.6,958) 1421,958 ; U1.54@1400.38,1007.78 cw(c1350.6,958) 1421,958 ; U1.54@1404.62,1012.03 cw(c1365.09,972.49) 1421,972.49 ; U1.54@1404.62,1012.03 cw(c1365.09,972.49) 1421,972.49 ; U1.54@1404.62,1012.03 cw(c1365.09,972.49) 1421,972.49 ; U1.54@1404.62,1012.03 cw(c1365.09,972.49) 1421,972.49 ; U1.54@1408.87,1016.27 cw(c1379.57,986.98) 1421,986.98 ; U1.54@1408.87,1016.27 cw(c1379.57,986.98) 1421,986.98 ; U1.54@1408.87,1016.27 cw(c1379.57,986.98) 1421,986.98 ; U1.54@1408.87,1016.27 cw(c1379.57,986.98) 1421,986.98 ; U1.54@1413.11,1020.51 cw(c1394.06,1001.46) 1421,1001.46 ; U1.54@1413.11,1020.51 cw(c1394.06,1001.46) 1421,1001.46 ; U1.54@1413.11,1020.51 cw(c1394.06,1001.46) 1421,1001.46 ; U1.54@1413.11,1020.51 cw(c1394.06,1001.46) 1421,1001.46
TEST_N: U1.55 U2.94 | length 1407.2
  Top Layer w10: U2.94@1420,400 1430.47,410.47 U1.55@1430.47,824.09 ; U2.94@1401.62,418.38 ccw(c1331.95,488.05) 1430.47,488.05 ; U2.94@1401.62,418.38 ccw(c1331.95,488.05) 1430.47,488.05 ; U2.94@1401.62,418.38 ccw(c1331.95,488.05) 1430.47,488.05 ; U2.94@1401.62,418.38 ccw(c1331.95,488.05) 1430.47,488.05 ; U2.94@1408.69,411.31 ccw(c1356.09,463.91) 1430.47,463.91 ; U2.94@1408.69,411.31 ccw(c1356.09,463.91) 1430.47,463.91 ; U2.94@1408.69,411.31 ccw(c1356.09,463.91) 1430.47,463.91 ; U2.94@1408.69,411.31 ccw(c1356.09,463.91) 1430.47,463.91 ; U2.94@1415.76,404.24 ccw(c1380.23,439.77) 1430.47,439.77 ; U2.94@1415.76,404.24 ccw(c1380.23,439.77) 1430.47,439.77 ; U2.94@1415.76,404.24 ccw(c1380.23,439.77) 1430.47,439.77 ; U2.94@1415.76,404.24 ccw(c1380.23,439.77) 1430.47,439.77 ; U1.55@1421.48,809.2 cw(c1399.77,787.49) 1430.47,787.49 ; U1.55@1421.48,809.2 cw(c1399.77,787.49) 1430.47,787.49 ; U1.55@1421.48,809.2 cw(c1399.77,787.49) 1430.47,787.49 ; U1.55@1421.48,809.2 cw(c1399.77,787.49) 1430.47,787.49 ; 1430.47,437.49 ccw(c1457.49,437.49) U2.94@1438.38,418.38 ; 1430.47,437.49 ccw(c1457.49,437.49) U2.94@1438.38,418.38 ; 1430.47,437.49 ccw(c1457.49,437.49) U2.94@1438.38,418.38 ; 1430.47,437.49 ccw(c1457.49,437.49) U2.94@1438.38,418.38 ; 1430.47,787.49 cw(c1461.17,787.49) U1.55@1439.46,809.2 ; 1430.47,787.49 cw(c1461.17,787.49) U1.55@1439.46,809.2 ; 1430.47,787.49 cw(c1461.17,787.49) U1.55@1439.46,809.2 ; 1430.47,787.49 cw(c1461.17,787.49) U1.55@1439.46,809.2
VDD: C3.2 U1.51 U2.85 U2.86 | length 2095.9
  Top Layer w30: U2.85@1020,300 U2.86@1020,400 1020,584 1151,715 1151,949 1226.09,1024.09 U1.51@1351.73,1024.09 ; U2.85@1008.69,311.31 ccw(c981.37,338.63) 1020,338.63 ; U2.85@1008.69,311.31 ccw(c981.37,338.63) 1020,338.63 ; U2.85@1008.69,311.31 ccw(c981.37,338.63) 1020,338.63 ; U2.85@1008.69,311.31 ccw(c981.37,338.63) 1020,338.63 ; U2.86@1008.69,388.69 cw(c981.37,361.37) 1020,361.37 ; U2.86@1008.69,388.69 cw(c981.37,361.37) 1020,361.37 ; U2.86@1008.69,388.69 cw(c981.37,361.37) 1020,361.37 ; U2.86@1008.69,388.69 cw(c981.37,361.37) 1020,361.37 ; U2.86@1008.69,411.31 ccw(c981.37,438.63) 1020,438.63 ; U2.86@1008.69,411.31 ccw(c981.37,438.63) 1020,438.63 ; U2.86@1008.69,411.31 ccw(c981.37,438.63) 1020,438.63 ; U2.86@1008.69,411.31 ccw(c981.37,438.63) 1020,438.63 ; 1020,338.63 ccw(c1058.63,338.63) U2.85@1031.31,311.31 ; 1020,338.63 ccw(c1058.63,338.63) U2.85@1031.31,311.31 ; 1020,338.63 ccw(c1058.63,338.63) U2.85@1031.31,311.31 ; 1020,338.63 ccw(c1058.63,338.63) U2.85@1031.31,311.31 ; 1020,361.37 cw(c1058.63,361.37) U2.86@1031.31,388.69 ; 1020,361.37 cw(c1058.63,361.37) U2.86@1031.31,388.69 ; 1020,361.37 cw(c1058.63,361.37) U2.86@1031.31,388.69 ; 1020,361.37 cw(c1058.63,361.37) U2.86@1031.31,388.69 ; 1020,438.63 ccw(c1058.63,438.63) U2.86@1031.31,411.31 ; 1020,438.63 ccw(c1058.63,438.63) U2.86@1031.31,411.31 ; 1020,438.63 ccw(c1058.63,438.63) U2.86@1031.31,411.31 ; 1020,438.63 ccw(c1058.63,438.63) U2.86@1031.31,411.31
  Bottom Layer w20: C3.2@1233.29,1026.93 1236.13,1024.09 U1.51@1351.73,1024.09 ; C3.2@1245.19,1042.37 ccw(c1289.31,1086.49) 1289.31,1024.09 ; C3.2@1245.19,1042.37 ccw(c1289.31,1086.49) 1289.31,1024.09 ; C3.2@1245.19,1042.37 ccw(c1289.31,1086.49) 1289.31,1024.09 ; C3.2@1245.19,1042.37 ccw(c1289.31,1086.49) 1289.31,1024.09 ; 1333.1,1024.09 cw(c1333.1,1005.47) U1.51@1346.28,1018.64 ; 1333.1,1024.09 ccw(c1333.1,1042.72) U1.51@1346.28,1029.55 ; 1333.1,1024.09 cw(c1333.1,1005.47) U1.51@1346.28,1018.64 ; 1333.1,1024.09 ccw(c1333.1,1042.72) U1.51@1346.28,1029.55 ; 1333.1,1024.09 ccw(c1333.1,1042.72) U1.51@1346.28,1029.55 ; 1333.1,1024.09 cw(c1333.1,1005.47) U1.51@1346.28,1018.64 ; 1333.1,1024.09 ccw(c1333.1,1042.72) U1.51@1346.28,1029.55 ; 1333.1,1024.09 cw(c1333.1,1005.47) U1.51@1346.28,1018.64
VDD15: C5.2 U1.52 U2.90 | length 1332.5
  Bottom Layer w20: U2.90@1220,400 1220,501 1360,641 C5.2@1360,700 1371.42,711.42 U1.52@1371.42,824.09 ; U2.90@1205.15,414.85 ccw(c1169.3,450.7) 1220,450.7 ; U2.90@1205.15,414.85 ccw(c1169.3,450.7) 1220,450.7 ; U2.90@1205.15,414.85 ccw(c1169.3,450.7) 1220,450.7 ; U2.90@1205.15,414.85 ccw(c1169.3,450.7) 1220,450.7 ; 1220,450.7 ccw(c1270.7,450.7) U2.90@1234.85,414.85 ; 1220,450.7 ccw(c1270.7,450.7) U2.90@1234.85,414.85 ; 1220,450.7 ccw(c1270.7,450.7) U2.90@1234.85,414.85 ; 1220,450.7 ccw(c1270.7,450.7) U2.90@1234.85,414.85 ; C5.2@1349.39,689.39 cw(c1323.79,663.79) 1360,663.79 ; C5.2@1349.39,689.39 cw(c1323.79,663.79) 1360,663.79 ; C5.2@1349.39,689.39 cw(c1323.79,663.79) 1360,663.79 ; C5.2@1349.39,689.39 cw(c1323.79,663.79) 1360,663.79 ; C5.2@1354.39,710.61 ccw(c1313.29,751.71) 1371.42,751.71 ; C5.2@1354.39,710.61 ccw(c1313.29,751.71) 1371.42,751.71 ; C5.2@1354.39,710.61 ccw(c1313.29,751.71) 1371.42,751.71 ; C5.2@1354.39,710.61 ccw(c1313.29,751.71) 1371.42,751.71 ; 1360,663.79 cw(c1396.21,663.79) C5.2@1370.61,689.39 ; 1360,663.79 cw(c1396.21,663.79) C5.2@1370.61,689.39 ; 1360,663.79 cw(c1396.21,663.79) C5.2@1370.61,689.39 ; 1360,663.79 cw(c1396.21,663.79) C5.2@1370.61,689.39 ; U1.52@1365.96,812.73 cw(c1352.79,799.56) 1371.42,799.56 ; U1.52@1365.96,812.73 cw(c1352.79,799.56) 1371.42,799.56 ; U1.52@1365.96,812.73 cw(c1352.79,799.56) 1371.42,799.56 ; U1.52@1365.96,812.73 cw(c1352.79,799.56) 1371.42,799.56 ; 1371.42,799.56 cw(c1390.05,799.56) U1.52@1376.87,812.73 ; 1371.42,799.56 cw(c1390.05,799.56) U1.52@1376.87,812.73 ; 1371.42,799.56 cw(c1390.05,799.56) U1.52@1376.87,812.73 ; 1371.42,799.56 cw(c1390.05,799.56) U1.52@1376.87,812.73
XTALIN: C1.1 JP2.1 R1.2 U1.48 XTAL1.1 | length 3471.8
  Top Layer w10: JP2.1@810,564.25 810,790 1000,980 XTAL1.1@1090,980 ; JP2.1@802.4,571.85 ccw(c784.05,590.2) 810,590.2 ; JP2.1@802.4,571.85 ccw(c784.05,590.2) 810,590.2 ; JP2.1@802.4,571.85 ccw(c784.05,590.2) 810,590.2 ; JP2.1@802.4,571.85 ccw(c784.05,590.2) 810,590.2 ; 810,590.2 ccw(c835.95,590.2) JP2.1@817.6,571.85 ; 810,590.2 ccw(c835.95,590.2) JP2.1@817.6,571.85 ; 810,590.2 ccw(c835.95,590.2) JP2.1@817.6,571.85 ; 810,590.2 ccw(c835.95,590.2) JP2.1@817.6,571.85 ; 1053.79,980 cw(c1053.79,943.79) XTAL1.1@1079.39,969.39 ; 1053.79,980 ccw(c1053.79,1016.21) XTAL1.1@1079.39,990.61 ; 1053.79,980 cw(c1053.79,943.79) XTAL1.1@1079.39,969.39 ; 1053.79,980 ccw(c1053.79,1016.21) XTAL1.1@1079.39,990.61 ; 1053.79,980 ccw(c1053.79,1016.21) XTAL1.1@1079.39,990.61 ; 1053.79,980 cw(c1053.79,943.79) XTAL1.1@1079.39,969.39 ; 1053.79,980 ccw(c1053.79,1016.21) XTAL1.1@1079.39,990.61 ; 1053.79,980 cw(c1053.79,943.79) XTAL1.1@1079.39,969.39
  Bottom Layer w10: R1.2@650,990 826,990 870,1034 C1.1@870,1060 931.73,1060 U1.48@1004.09,1132.36 1004.09,1065.91 XTAL1.1@1090,980 ; R1.2@664.14,975.86 cw(c698.28,941.72) 698.28,990 ; R1.2@664.14,975.86 cw(c698.28,941.72) 698.28,990 ; R1.2@664.14,975.86 cw(c698.28,941.72) 698.28,990 ; R1.2@664.14,975.86 cw(c698.28,941.72) 698.28,990 ; R1.2@664.14,1004.14 ccw(c698.28,1038.28) 698.28,990 ; R1.2@664.14,1004.14 ccw(c698.28,1038.28) 698.28,990 ; R1.2@664.14,1004.14 ccw(c698.28,1038.28) 698.28,990 ; R1.2@664.14,1004.14 ccw(c698.28,1038.28) 698.28,990 ; 841.5,1005.5 ccw(c815.17,1031.83) C1.1@847.59,1050.16 ; 841.5,1005.5 ccw(c815.17,1031.83) C1.1@847.59,1050.16 ; 841.5,1005.5 ccw(c815.17,1031.83) C1.1@847.59,1050.16 ; 841.5,1005.5 ccw(c815.17,1031.83) C1.1@847.59,1050.16 ; 850.8,1014.8 ccw(c827.05,1038.55) C1.1@856.29,1055.08 ; 850.8,1014.8 ccw(c827.05,1038.55) C1.1@856.29,1055.08 ; 850.8,1014.8 ccw(c827.05,1038.55) C1.1@856.29,1055.08 ; 850.8,1014.8 ccw(c827.05,1038.55) C1.1@856.29,1055.08 ; 860.11,1024.11 ccw(c838.94,1045.27) C1.1@865,1060 ; 860.11,1024.11 ccw(c838.94,1045.27) C1.1@865,1060 ; 860.11,1024.11 ccw(c838.94,1045.27) C1.1@865,1060 ; 860.11,1024.11 ccw(c838.94,1045.27) C1.1@865,1060 ; 869.41,1033.41 ccw(c850.83,1051.99) C1.1@873.71,1064.92 ; 869.41,1033.41 ccw(c850.83,1051.99) C1.1@873.71,1064.92 ; 869.41,1033.41 ccw(c850.83,1051.99) C1.1@873.71,1064.92 ; 869.41,1033.41 ccw(c850.83,1051.99) C1.1@873.71,1064.92 ; C1.1@889.14,1045.86 cw(c923.28,1011.72) 923.28,1060 ; C1.1@889.14,1045.86 cw(c923.28,1011.72) 923.28,1060 ; C1.1@889.14,1045.86 cw(c923.28,1011.72) 923.28,1060 ; C1.1@889.14,1045.86 cw(c923.28,1011.72) 923.28,1060 ; C1.1@889.14,1074.14 ccw(c923.28,1108.28) 923.28,1060 ; C1.1@889.14,1074.14 ccw(c923.28,1108.28) 923.28,1060 ; C1.1@889.14,1074.14 ccw(c923.28,1108.28) 923.28,1060 ; C1.1@889.14,1074.14 ccw(c923.28,1108.28) 923.28,1060 ; 972.3,1100.57 ccw(c940.51,1132.36) U1.48@985.47,1132.36 ; 972.3,1100.57 ccw(c940.51,1132.36) U1.48@985.47,1132.36 ; 972.3,1100.57 ccw(c940.51,1132.36) U1.48@985.47,1132.36 ; 972.3,1100.57 ccw(c940.51,1132.36) U1.48@985.47,1132.36 ; 986.56,1114.83 cw(c998.19,1103.2) U1.48@998.19,1119.65 ; 986.56,1114.83 cw(c998.19,1103.2) U1.48@998.19,1119.65 ; 986.56,1114.83 cw(c998.19,1103.2) U1.48@998.19,1119.65 ; 986.56,1114.83 cw(c998.19,1103.2) U1.48@998.19,1119.65 ; U1.48@995.1,1123.37 cw(c973.39,1101.66) 1004.09,1101.66 ; U1.48@995.1,1123.37 cw(c973.39,1101.66) 1004.09,1101.66 ; U1.48@995.1,1123.37 cw(c973.39,1101.66) 1004.09,1101.66 ; U1.48@995.1,1123.37 cw(c973.39,1101.66) 1004.09,1101.66 ; 1004.09,1101.66 cw(c1034.79,1101.66) U1.48@1013.09,1123.37 ; 1004.09,1101.66 cw(c1034.79,1101.66) U1.48@1013.09,1123.37 ; 1004.09,1101.66 cw(c1034.79,1101.66) U1.48@1013.09,1123.37 ; 1004.09,1101.66 cw(c1034.79,1101.66) U1.48@1013.09,1123.37 ; 1064.39,1005.61 cw(c1038.79,980) XTAL1.1@1075,980 ; 1064.39,1005.61 ccw(c1090,1031.21) XTAL1.1@1090,995 ; 1064.39,1005.61 cw(c1038.79,980) XTAL1.1@1075,980 ; 1064.39,1005.61 ccw(c1090,1031.21) XTAL1.1@1090,995 ; 1064.39,1005.61 ccw(c1090,1031.21) XTAL1.1@1090,995 ; 1064.39,1005.61 cw(c1038.79,980) XTAL1.1@1075,980 ; 1064.39,1005.61 ccw(c1090,1031.21) XTAL1.1@1090,995 ; 1064.39,1005.61 cw(c1038.79,980) XTAL1.1@1075,980
XTALIN_1: JP2.2 JP3.1 U2.82 | length 1414.7
  Top Layer w10: JP3.1@569.61,526.22 570.94,524.88 JP2.2@810,524.88 820,514.88 U2.82@820,400 ; JP3.1@586.46,518.62 cw(c601.58,503.5) 601.58,524.88 ; JP3.1@586.46,518.62 cw(c601.58,503.5) 601.58,524.88 ; JP3.1@586.46,518.62 cw(c601.58,503.5) 601.58,524.88 ; JP3.1@586.46,533.82 ccw(c608.04,555.4) 608.04,524.88 ; JP3.1@586.46,533.82 ccw(c608.04,555.4) 608.04,524.88 ; JP3.1@586.46,533.82 ccw(c608.04,555.4) 608.04,524.88 ; 769.8,524.88 cw(c769.8,498.93) JP2.2@788.15,517.28 ; 769.8,524.88 ccw(c769.8,550.83) JP2.2@788.15,532.48 ; 769.8,524.88 ccw(c769.8,550.83) JP2.2@788.15,532.48 ; 769.8,524.88 cw(c769.8,498.93) JP2.2@788.15,517.28 ; 769.8,524.88 ccw(c769.8,550.83) JP2.2@788.15,532.48 ; 769.8,524.88 cw(c769.8,498.93) JP2.2@788.15,517.28 ; U2.82@801.62,418.38 ccw(c757.23,462.77) 820,462.77 ; U2.82@801.62,418.38 ccw(c757.23,462.77) 820,462.77 ; U2.82@801.62,418.38 ccw(c757.23,462.77) 820,462.77 ; U2.82@801.62,418.38 ccw(c757.23,462.77) 820,462.77 ; U2.82@808.69,411.31 ccw(c781.37,438.63) 820,438.63 ; U2.82@808.69,411.31 ccw(c781.37,438.63) 820,438.63 ; U2.82@808.69,411.31 ccw(c781.37,438.63) 820,438.63 ; U2.82@808.69,411.31 ccw(c781.37,438.63) 820,438.63 ; JP2.2@816.65,517.28 cw(c808.57,509.2) JP2.2@820,509.2 ; JP2.2@816.65,517.28 cw(c808.57,509.2) JP2.2@820,509.2 ; JP2.2@816.65,517.28 cw(c808.57,509.2) JP2.2@820,509.2 ; JP2.2@816.65,517.28 cw(c808.57,509.2) JP2.2@820,509.2 ; 820,438.63 ccw(c858.63,438.63) U2.82@831.31,411.31 ; 820,438.63 ccw(c858.63,438.63) U2.82@831.31,411.31 ; 820,438.63 ccw(c858.63,438.63) U2.82@831.31,411.31 ; 820,438.63 ccw(c858.63,438.63) U2.82@831.31,411.31 ; 820,462.77 ccw(c882.77,462.77) U2.82@838.38,418.38 ; 820,462.77 ccw(c882.77,462.77) U2.82@838.38,418.38 ; 820,462.77 ccw(c882.77,462.77) U2.82@838.38,418.38 ; 820,462.77 ccw(c882.77,462.77) U2.82@838.38,418.38 ; 820,488.67 cw(c860.47,488.67) JP2.2@831.85,517.28 ; 820,488.67 cw(c860.47,488.67) JP2.2@831.85,517.28 ; 820,488.67 cw(c860.47,488.67) JP2.2@831.85,517.28 ; 820,488.67 cw(c860.47,488.67) JP2.2@831.85,517.28
XTALOUT: C2.1 JP1.1 R1.1 U1.49 XTAL1.2 | length 4156.6
  Top Layer w10: JP1.1@910,564.25 1090,744.25 XTAL1.2@1090,920 ; JP1.1@925,564.25 cw(c961.21,564.25) 935.61,589.86 ; JP1.1@925,564.25 cw(c961.21,564.25) 935.61,589.86 ; JP1.1@925,564.25 cw(c961.21,564.25) 935.61,589.86 ; JP1.1@925,564.25 cw(c961.21,564.25) 935.61,589.86 ; JP1.1@935,564.25 cw(c995.36,564.25) 952.68,606.93 ; JP1.1@935,564.25 cw(c995.36,564.25) 952.68,606.93 ; JP1.1@935,564.25 cw(c995.36,564.25) 952.68,606.93 ; JP1.1@935,564.25 cw(c995.36,564.25) 952.68,606.93 ; XTAL1.2@1079.39,909.39 cw(c1053.79,883.79) 1090,883.79 ; XTAL1.2@1079.39,909.39 cw(c1053.79,883.79) 1090,883.79 ; XTAL1.2@1079.39,909.39 cw(c1053.79,883.79) 1090,883.79 ; XTAL1.2@1079.39,909.39 cw(c1053.79,883.79) 1090,883.79 ; 1090,883.79 cw(c1126.21,883.79) XTAL1.2@1100.61,909.39 ; 1090,883.79 cw(c1126.21,883.79) XTAL1.2@1100.61,909.39 ; 1090,883.79 cw(c1126.21,883.79) XTAL1.2@1100.61,909.39 ; 1090,883.79 cw(c1126.21,883.79) XTAL1.2@1100.61,909.39
  Bottom Layer w10: R1.1@650,900 675,925 847,925 870,902 C2.1@870,840 950,920 XTAL1.2@1090,920 1185.91,824.09 U1.49@1312.36,824.09 ; R1.1@642.93,912.07 cw(c674.14,880.86) R1.1@674.14,925 ; R1.1@642.93,912.07 cw(c674.14,880.86) R1.1@674.14,925 ; R1.1@642.93,912.07 cw(c674.14,880.86) R1.1@674.14,925 ; R1.1@642.93,912.07 cw(c674.14,880.86) R1.1@674.14,925 ; R1.1@650,905 cw(c698.28,856.72) 698.28,925 ; R1.1@650,905 cw(c698.28,856.72) 698.28,925 ; R1.1@650,905 cw(c698.28,856.72) 698.28,925 ; R1.1@650,905 cw(c698.28,856.72) 698.28,925 ; R1.1@657.07,897.93 cw(c722.43,832.57) 722.43,925 ; R1.1@657.07,897.93 cw(c722.43,832.57) 722.43,925 ; R1.1@657.07,897.93 cw(c722.43,832.57) 722.43,925 ; R1.1@657.07,897.93 cw(c722.43,832.57) 722.43,925 ; R1.1@664.14,890.86 cw(c746.57,808.43) 746.57,925 ; R1.1@664.14,890.86 cw(c746.57,808.43) 746.57,925 ; R1.1@664.14,890.86 cw(c746.57,808.43) 746.57,925 ; R1.1@664.14,890.86 cw(c746.57,808.43) 746.57,925 ; C2.1@855.86,854.14 ccw(c821.72,888.28) 870,888.28 ; C2.1@855.86,854.14 ccw(c821.72,888.28) 870,888.28 ; C2.1@855.86,854.14 ccw(c821.72,888.28) 870,888.28 ; C2.1@855.86,854.14 ccw(c821.72,888.28) 870,888.28 ; 870,888.28 ccw(c918.28,888.28) C2.1@884.14,854.14 ; 870,888.28 ccw(c918.28,888.28) C2.1@884.14,854.14 ; 870,888.28 ccw(c918.28,888.28) C2.1@884.14,854.14 ; 870,888.28 ccw(c918.28,888.28) C2.1@884.14,854.14 ; C2.1@875,860 ccw(c875,896.21) 900.61,870.61 ; C2.1@875,860 ccw(c875,896.21) 900.61,870.61 ; C2.1@875,860 ccw(c875,896.21) 900.61,870.61 ; C2.1@875,860 ccw(c875,896.21) 900.61,870.61 ; C2.1@885,840 cw(c921.21,840) 895.61,865.61 ; C2.1@885,840 cw(c921.21,840) 895.61,865.61 ; C2.1@885,840 cw(c921.21,840) 895.61,865.61 ; C2.1@885,840 cw(c921.21,840) 895.61,865.61 ; C2.1@895,840 cw(c955.36,840) 912.68,882.68 ; C2.1@895,840 cw(c955.36,840) 912.68,882.68 ; C2.1@895,840 cw(c955.36,840) 912.68,882.68 ; C2.1@895,840 cw(c955.36,840) 912.68,882.68 ; 1053.79,920 cw(c1053.79,883.79) XTAL1.2@1079.39,909.39 ; 1053.79,920 ccw(c1053.79,956.21) XTAL1.2@1079.39,930.61 ; 1053.79,920 cw(c1053.79,883.79) XTAL1.2@1079.39,909.39 ; 1053.79,920 ccw(c1053.79,956.21) XTAL1.2@1079.39,930.61 ; 1053.79,920 ccw(c1053.79,956.21) XTAL1.2@1079.39,930.61 ; 1053.79,920 cw(c1053.79,883.79) XTAL1.2@1079.39,909.39 ; 1053.79,920 ccw(c1053.79,956.21) XTAL1.2@1079.39,930.61 ; 1053.79,920 cw(c1053.79,883.79) XTAL1.2@1079.39,909.39 ; XTAL1.2@1090,905 cw(c1090,868.79) 1115.61,894.39 ; XTAL1.2@1090,905 cw(c1090,868.79) 1115.61,894.39 ; XTAL1.2@1090,905 cw(c1090,868.79) 1115.61,894.39 ; XTAL1.2@1090,905 cw(c1090,868.79) 1115.61,894.39 ; XTAL1.2@1105,920 ccw(c1141.21,920) 1115.61,894.39 ; XTAL1.2@1105,920 ccw(c1141.21,920) 1115.61,894.39 ; XTAL1.2@1105,920 ccw(c1141.21,920) 1115.61,894.39 ; XTAL1.2@1105,920 ccw(c1141.21,920) 1115.61,894.39 ; 1281.66,824.09 cw(c1281.66,793.39) U1.49@1303.37,815.1 ; 1281.66,824.09 ccw(c1281.66,854.79) U1.49@1303.37,833.09 ; 1281.66,824.09 cw(c1281.66,793.39) U1.49@1303.37,815.1 ; 1281.66,824.09 ccw(c1281.66,854.79) U1.49@1303.37,833.09 ; 1281.66,824.09 ccw(c1281.66,854.79) U1.49@1303.37,833.09 ; 1281.66,824.09 cw(c1281.66,793.39) U1.49@1303.37,815.1 ; 1281.66,824.09 ccw(c1281.66,854.79) U1.49@1303.37,833.09 ; 1281.66,824.09 cw(c1281.66,793.39) U1.49@1303.37,815.1
XTALOUT_1: JP1.2 U2.84 | length 929.2
  Top Layer w10: JP1.2@910,524.88 920,514.88 U2.84@920,400 ; U2.84@901.62,418.38 ccw(c857.23,462.77) 920,462.77 ; U2.84@901.62,418.38 ccw(c857.23,462.77) 920,462.77 ; U2.84@901.62,418.38 ccw(c857.23,462.77) 920,462.77 ; U2.84@901.62,418.38 ccw(c857.23,462.77) 920,462.77 ; U2.84@908.69,411.31 ccw(c881.37,438.63) 920,438.63 ; U2.84@908.69,411.31 ccw(c881.37,438.63) 920,438.63 ; U2.84@908.69,411.31 ccw(c881.37,438.63) 920,438.63 ; U2.84@908.69,411.31 ccw(c881.37,438.63) 920,438.63 ; JP1.2@916.65,517.28 cw(c908.57,509.2) JP1.2@920,509.2 ; JP1.2@916.65,517.28 cw(c908.57,509.2) JP1.2@920,509.2 ; JP1.2@916.65,517.28 cw(c908.57,509.2) JP1.2@920,509.2 ; JP1.2@916.65,517.28 cw(c908.57,509.2) JP1.2@920,509.2 ; 920,438.63 ccw(c958.63,438.63) U2.84@931.31,411.31 ; 920,438.63 ccw(c958.63,438.63) U2.84@931.31,411.31 ; 920,438.63 ccw(c958.63,438.63) U2.84@931.31,411.31 ; 920,438.63 ccw(c958.63,438.63) U2.84@931.31,411.31 ; 920,462.77 ccw(c982.77,462.77) U2.84@938.38,418.38 ; 920,462.77 ccw(c982.77,462.77) U2.84@938.38,418.38 ; 920,462.77 ccw(c982.77,462.77) U2.84@938.38,418.38 ; 920,462.77 ccw(c982.77,462.77) U2.84@938.38,418.38 ; 920,488.67 cw(c960.47,488.67) JP1.2@931.85,517.28 ; 920,488.67 cw(c960.47,488.67) JP1.2@931.85,517.28 ; 920,488.67 cw(c960.47,488.67) JP1.2@931.85,517.28 ; 920,488.67 cw(c960.47,488.67) JP1.2@931.85,517.28
pads on no net: U1.0 U2.0 U2.1 U2.2 U2.19 U2.20 U2.21 U2.22 U2.23 U2.24 U2.25 U2.26 U2.27 U2.28 U2.29 U2.30 U2.33 U2.34 U2.49 U2.50 U2.51 U2.52 U2.53 U2.54 U2.55 U2.56 U2.57 U2.58 U2.74 U2.75 U2.76 U2.77 U2.78 U2.79 U2.80 U2.81 U2.83 U2.89 U2.91 U2.104 U2.105 U2.106 U2.107 U2.108

## Silkscreen, mask and mechanical layers (free items; w line width, h text height)
Top Overlay:
  lines w10: 40,2730 40,2750 ; 100,2720 40,2740 ; 100,2760 40,2740 ; 1134.09,2740 40,2740 ; 1695.91,2740 2790,2740 ; 2730,2720 2790,2740 ; 2730,2760 2790,2740 ; 2790,2730 2790,2750 ; 3100,70 3120,10 ; 3100,2410 3120,2470 ; 3110,10 3130,10 ; 3110,2470 3130,2470 ; 3120,959.09 3120,10 ; 3120,1520.91 3120,2470 ; 3140,70 3120,10 ; 3140,2410 3120,2470
  text "2750 (mil)" at 1144.09,2704.01 h60
  text "2460 (mil)" at 3155.99,969.09 h60 r90
  text "20160720" at 220,80 h60
  text "FM375 LQFP64 SOCKET BY XDY" at 950,80 h60
Mechanical 1:
  lines w5: 2540,20 140,20 cw(c140,120) 40,120 40,2370 cw(c140,2370) 140,2470 2690,2470 cw(c2690,2370) 2790,2370 ; 2542.07,20 2790,282.51 ; 2790,282.51 2790,2370 ; 2790,282.51 2790,2370
Drill Drawing:
  text ".Legend" at 2900,30 h30

## Text inside footprints (layer, text, board x,y; h text height)
U1: Top Overlay "FPQ-64-0.5-06" at 1180,1960 h47.24; Top Overlay "1" at 1995,1080 h120 r180; Bottom Overlay "1" at 1965,1080 h120 r180
U2: Top Overlay "108" at 2200,385 h40; Top Overlay "107" at 2200,275 h40; Top Overlay "80" at 590,380 h40; Top Overlay "79" at 590,280 h40; Top Overlay "78" at 400,595 h40; Top Overlay "77" at 285,595 h40; Top Overlay "56" at 390,1865 h40; Top Overlay "55" at 290,1860 h40; Top Overlay "54" at 585,2065 h40; Top Overlay "53" at 580,2190 h40; Top Overlay "25" at 2185,2190 h40; Top Overlay "26" at 2190,2075 h40; Top Overlay "24" at 2385,1865 h40; Top Overlay "23" at 2490,1865 h40; Top Overlay "2" at 2410,595 h40; Top Overlay "1" at 2520,595 h40